# Altium PCB PCB2.PcbDoc
Units mil, origin at the board's own origin, x right, y up, seen from the top; angles counter-clockwise.
Board outline 4460 x 3910 mil, 2 copper layers (Top Layer, Bottom Layer); 37 components, 34 nets, 145 pads, 5 vias.
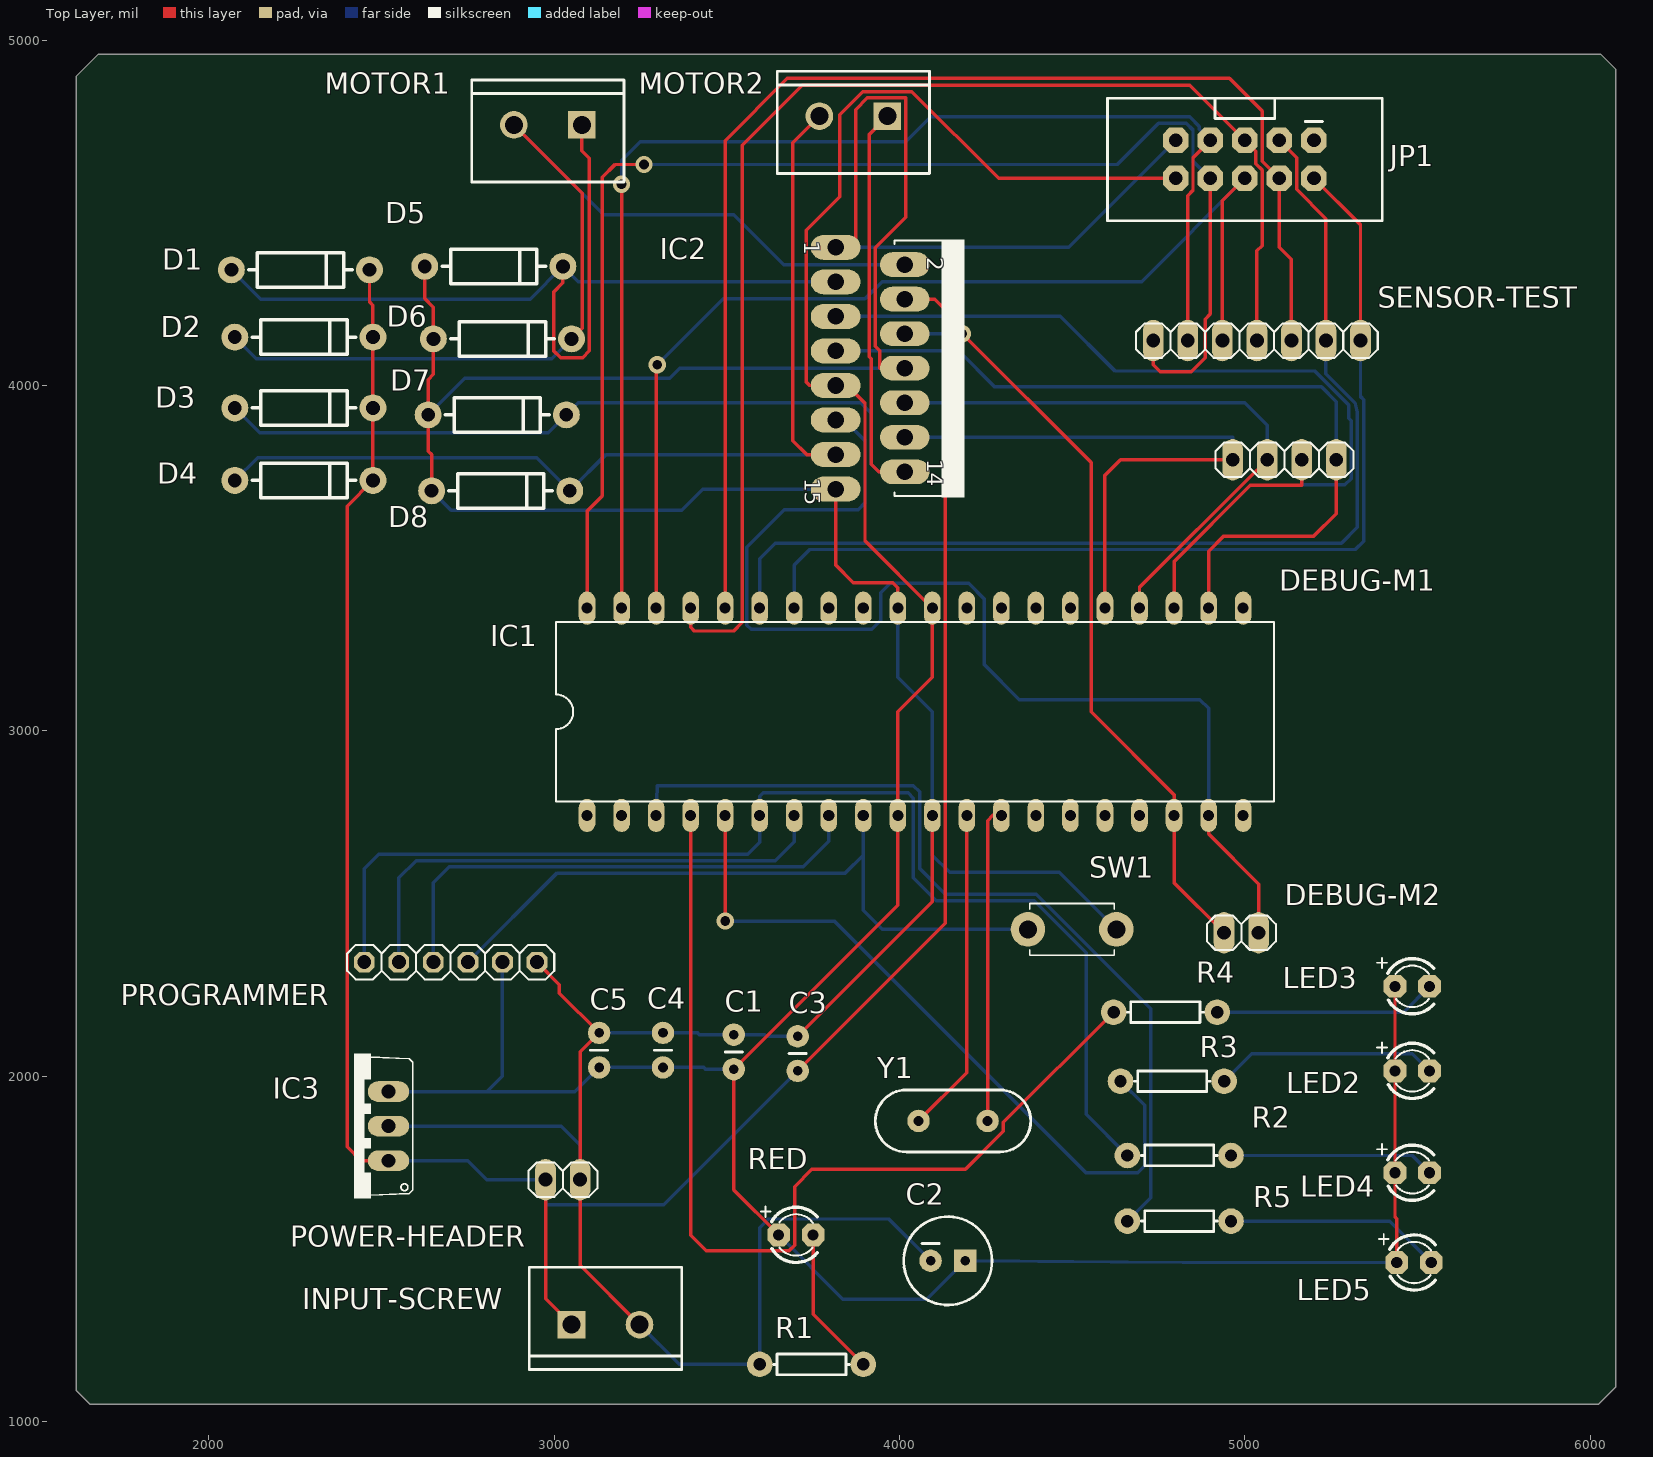
[diagram p0: Top Layer view]
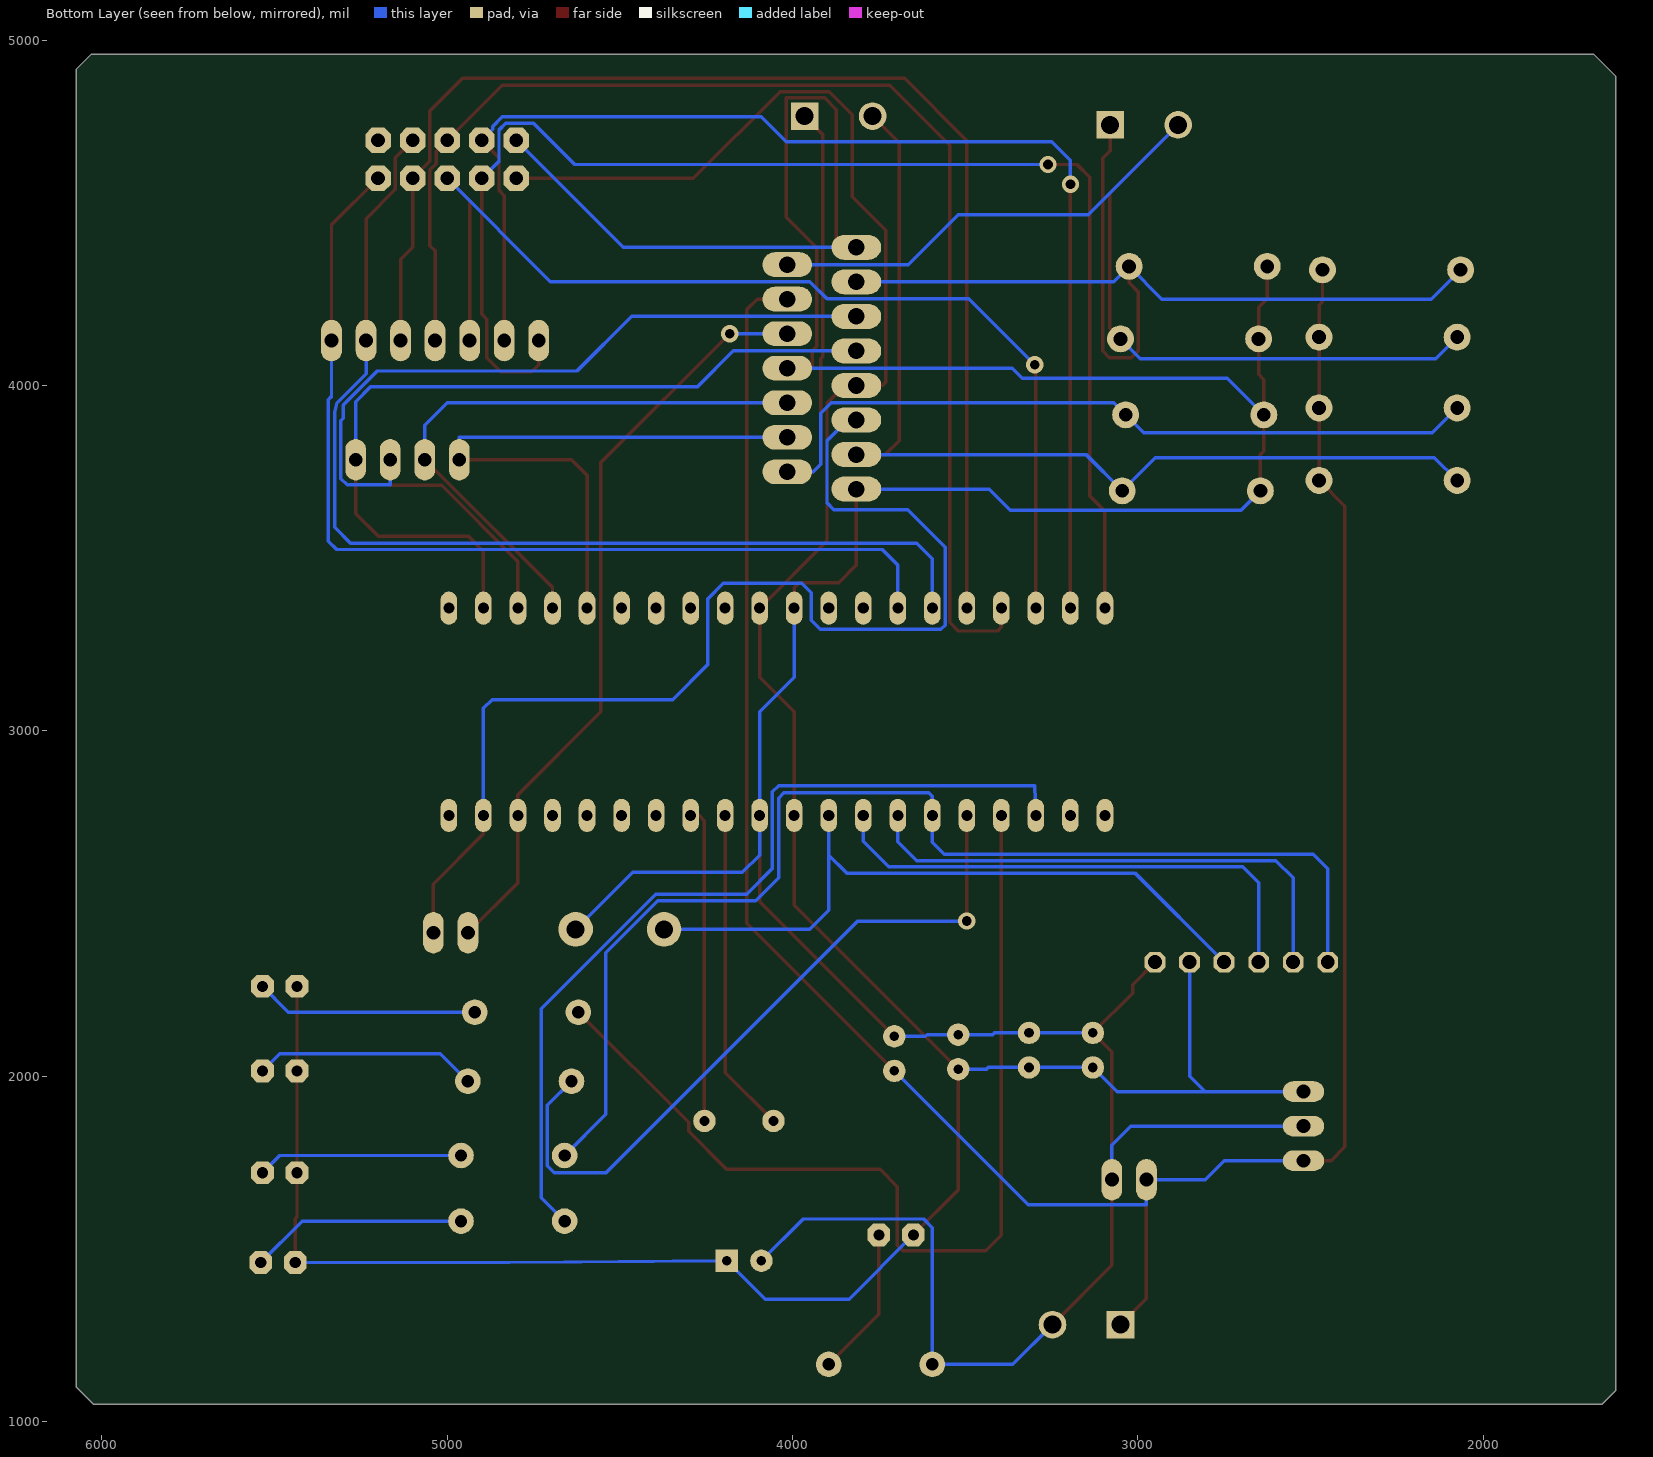
[diagram p1: Bottom Layer view, seen from below]

## Layer stack, top to bottom
Top Solder: solder mask 0.4, Solder Resist, Dk 3.5
Top Layer: signal copper 1.4
Dielectric 1: dielectric 12.6, FR-4, Dk 4.8
Bottom Layer: signal copper 1.4
Bottom Solder: solder mask 0.4, Solder Resist, Dk 3.5

## Board outline
1615,1090 1655,1050 6025,1050 6075,1100 6075,4915 6030,4960 1680,4960 1615,4895

## Design rules (kind name [scope] priority, off if disabled: settings)
Clearance [All] p1: gap=8 ignorepadtopadclearanceinfootprint=FALSE except(0: Arc-Hole Track-Hole SMDPad-SMDPad SMDPad-THPad SMDPad-Via SMDPad-Hole THPad-Hole Via-Hole Fill-Hole Poly-Hole Region-Hole Text-Hole)
Clearance "Clearance (Same Net)" [All] p2: gap=0 ignorepadtopadclearanceinfootprint=FALSE except(8: SMDPad-SMDPad SMDPad-THPad SMDPad-Via)
HoleSize HoleSize_1 [All] p1: absolutevalues=TRUE maxlimit=100000 minlimit=20 maxpercent=80.000 minpercent=20.000
HoleSize [All] p2: absolutevalues=TRUE maxlimit=100 minlimit=1 maxpercent=80.000 minpercent=20.000
HoleToHoleClearance mdViaViaSameLayer [All] p1: gap=8 allowstackedmicrovias=TRUE
HoleToHoleClearance [All] p2: gap=10 allowstackedmicrovias=TRUE
PasteMaskExpansion mlMinCreamFrame [All] p1: expansion=0
PasteMaskExpansion [All] p2: expansion=0
PolygonConnect ThermalVias [IsVia] p1: connectstyle=Direct reliefconductorwidth=10 reliefentries=4 polygonreliefangle="90 Angle" airgapwidth=10
PolygonConnect [All] p2: connectstyle=Relief reliefconductorwidth=10 reliefentries=4 polygonreliefangle="90 Angle" airgapwidth=10
RoutingVias [All] p1: holewidth=28 width=50 viastyle="Through Hole" minholewidth=28 minwidth=50 maxholewidth=28 maxwidth=50
SilkToSilkClearance [All] p1 off: silktosilkclearance=10
SilkToSolderMaskClearance [IsPad] p1 off: minsilkscreentomaskgap=10 clearancetoexposedcopper=TRUE
SolderMaskExpansion mlMinStopFrame [All] p1: expansion=4 istentingtop=FALSE
SolderMaskExpansion [All] p2: expansion=4 istentingtop=FALSE
Width Width_1 [All] p1: maxlimit=100000 minlimit=8 preferedwidth=10
Width [All] p2: maxlimit=10 minlimit=10 preferedwidth=10
25 further rules are at their usual default settings.

## Components (designator, comment, footprint, x,y, rotation, side; value= is the part's Value field where it differs from the comment)
C1 "100n" CAP-PTH-SMALL 3520,2020 r90 top
C2 "100u" CPOL-RADIAL-100UF-25V 4140,1465 r0 top
C3 "100p" CAP-PTH-SMALL 3705,2115 r270 top
C4 "100n" CAP-PTH-SMALL 3315,2025 r90 top
C5 "100n" CAP-PTH-SMALL 3130,2025 r90 top
D1 "DIODEPTH" DIODE-1N4001 2265,4335 r0 top
D2 "DIODEPTH" DIODE-1N4001 2275,4140 r0 top
D3 "DIODEPTH" DIODE-1N4001 2275,3935 r0 top
D4 "DIODEPTH" DIODE-1N4001 2275,3725 r0 top
D5 "DIODEPTH" DIODE-1N4001 2825,4345 r0 top
D6 "DIODEPTH" DIODE-1N4001 2850,4135 r0 top
D7 "DIODEPTH" DIODE-1N4001 2835,3915 r0 top
D8 "DIODEPTH" DIODE-1N4001 2845,3695 r0 top
DEBUG-M1 "PINHD-1X4" 1X04 5115,3785 r0 top
DEBUG-M2 "PINHD-1X2" 1X02 4990,2415 r180 top
IC1 "MEGA16-P" DIL40 4045,3055 r0 top
IC2 "L298" MULTIWATT-15 4115,4050 r270 top
IC3 "78*TV" TO220V 2420,1855 r90 top
INPUT-SCREW "M025MM" SCREWTERMINAL-5MM-2 3050,1280 r0 top
JP1 "M05X2SHD_LOCK" 2X5-SHROUDED_LOCK 5000,4655 r270 top
LED2 "LED3MM" LED3MM 5485,2015 r0 top
LED3 "LED3MM" LED3MM 5485,2260 r0 top
LED4 "LED3MM" LED3MM 5485,1720 r0 top
LED5 "LED3MM" LED3MM 5490,1460 r0 top
MOTOR1 "M025MM" SCREWTERMINAL-5MM-2 3080,4755 r180 top
MOTOR2 "M025MM" SCREWTERMINAL-5MM-2 3965,4780 r180 top
POWER-HEADER "PINHD-1X2" 1X02 3025,1700 r0 top
PROGRAMMER "PINHD-1X6" 1X06 2700,2330 r0 top
R1 "680" AXIAL-0.3 3745,1165 r0 top
R2 "680" AXIAL-0.3 4810,1770 r0 top
R3 "680" AXIAL-0.3 4790,1985 r0 top
R4 "680" AXIAL-0.3 4770,2185 r0 top
R5 "680" AXIAL-0.3 4810,1580 r0 top
RED "LED3MM" LED3MM 3700,1540 r0 top
SENSOR-TEST "PINHD-1X7" 1x07 -44055,-45630 r180 top
SW1 "SWITCH_PUSHBUTTONEVQ-PE" TACT_PANA-EVQ 4500,2425 r180 top
Y1 "CRYSTALHC49US" HC49US 4155,1870 r180 top

## Footprints (in the part's own frame and the unit in brackets; to place one, negate y for a bottom-side part, rotate by r counter-clockwise, add the part's x,y. Pads: shape width x height; smd on the part's side, far side on the other; paste and mask are expansions set on the pad)
1X02 [mil]
  oval 60x120 hole 40: 1(-50,0) 2(50,0)
  silkscreen extent -100,-50 100,50
1X04 [mil]
  oval 60x120 hole 40: 1(-150,0) 2(-50,0) 3(50,0) 4(150,0)
  silkscreen extent -200,-50 200,50
1X06 [mil]
  oct 60x60 hole 40: 1(-250,0) 2(-150,0) 3(-50,0) 4(50,0) 5(150,0) 6(250,0)
  silkscreen extent -300,-50 300,50
1x07 [mil]
  oval 60x120 hole 40: 1(-49390,-49760) 2(-49290,-49760) 3(-49190,-49760) 4(-49090,-49760) 5(-48990,-49760) 6(-48890,-49760) 7(-48790,-49760)
  silkscreen extent -49440,-49810 -48740,-49710
2X5-SHROUDED_LOCK [mil]
  oct 74x74 hole 40: 1(-55,200) 2(55,200) 3(-55,100) 4(55,100) 5(-55,0) 6(55,0) 7(-55,-100) 8(55,-100) 9(-55,-200) 10(55,-200)
  silkscreen extent -177,-398 178,398
AXIAL-0.3 [mil]
  round 74 hole 36: P$1(-150,0) P$2(150,0)
  silkscreen extent -110,-30 110,30
CAP-PTH-SMALL [mil]
  round 65 hole 28: 1(0,0) 2(100,0)
  silkscreen extent 50,-25 50,25
CPOL-RADIAL-100UF-25V [mil]
  rect 65x65 hole 28: 1(50,0)
  round 65 hole 28: 2(-50,0)
  silkscreen extent -128,-128 128,128
DIL40 [mil]
  oval 48x96 hole 32: 1(-950,-300) 2(-850,-300) 3(-750,-300) 4(-650,-300) 5(-550,-300) 6(-450,-300) 7(-350,-300) 8(-250,-300) 9(-150,-300) 10(-50,-300) 11(50,-300) 12(150,-300) 13(250,-300) 14(350,-300) 15(450,-300) 16(550,-300) 17(650,-300) 18(750,-300) 19(850,-300) 20(950,-300) 21(950,300) 22(850,300) 23(750,300) 24(650,300) 25(550,300) 26(450,300) 27(350,300) 28(250,300) 29(150,300) 30(50,300) 31(-50,300) 32(-150,300) 33(-250,300) 34(-350,300) 35(-450,300) 36(-550,300) 37(-650,300) 38(-750,300) 39(-850,300) 40(-950,300)
  silkscreen extent -1040,-260 1040,260
DIODE-1N4001 [mil]
  round 78 hole 40: A(-200,0) C(200,0)
  silkscreen extent -150,-50 150,50
HC49US [mil]
  round 65 hole 28: 1(-100,0) 2(100,0)
  silkscreen extent -225,-90 225,90
LED3MM [mil]
  oct 66x66 hole 32: A(-50,0) K(50,0)
  silkscreen extent -102,-80 62,83
MULTIWATT-15 [mil]
  oval 72x144 hole 48: 1(-350,-300) 2(-300,-100) 3(-250,-300) 4(-200,-100) 5(-150,-300) 6(-100,-100) 7(-50,-300) 8(0,-100) 9(50,-300) 10(100,-100) 11(150,-300) 12(200,-100) 13(250,-300) 14(300,-100) 15(350,-300)
  silkscreen extent -373,-130 374,73
SCREWTERMINAL-5MM-2 [mil]
  rect 80x80 hole 52: 1(0,0)
  round 80 hole 52: 2(197,0)
  silkscreen extent -122,-130 319,166
TACT_PANA-EVQ [mil]
  round 100 hole 52: P$1(-127.95,0) P$2(128,0)
  silkscreen extent -122,-75 123,75
TO220V [mil]
  oval 60x120 hole 40: 1(-100,-100) 2(0,-100) 3(100,-100)
  silkscreen extent -210,-170 210,0

## Part data
C1 C3 C4 C5: library part CAPPTH, "CapacitorStandard 0603 ceramic capacitor, and 0.1\" leaded capacitor."
C2: library part CAP_POLPTH1, "Capacitor PolarizedThese are standard SMD and PTH capacitors. Normally 10uF, 47uF, and 100uF in electrolytic and tantalum varieties. Always verify the external diameter of the through hole cap, it varies with capacity, voltage, and manufacturer. The EIA devices should be standard."
D1 D2 D3 D4 D5 D6 D7 D8: "DiodeThese are standard reverse protection diodes and small signal diodes. SMA package can handle up to about 1A. SOD-323 can handle about 200mA. What the SOD-323 package when ordering, there are some mfgs out there that are 5-pin packages."
DEBUG-M1 DEBUG-M2 POWER-HEADER PROGRAMMER SENSOR-TEST: "PIN HEADER"
IC1: "MICROCONTROLLER   16 Kbytes FLASH 1 kbytes SRAM 512 bytes EEPROM USART 8-channel 10 bit ADC   Source: avr.lbr"
IC2: "DUAL FULL-BRIDGE DRIVER"
IC3: "Positive VOLTAGE REGULATOR   Source: http://cache.national.com/ds/LM/LM78L05.pdf http://www.fairchildsemi.com/ds/LM/LM7805.pdf"
INPUT-SCREW MOTOR1 MOTOR2: "Standard 2-pin 0.1\" header. Use with  - straight break away headers ( PRT-00116) - right angle break away headers (PRT-00553) - swiss pins (PRT-00743) - machine pins (PRT-00117) - female headers (PRT-00115)   Molex polarized connector foot print use with: PRT-08233 with associated crimp pins and housings.  2.54_SCREWTERM for use with  PRT-10571.  3.5mm Screw Terminal footprints for  PRT-08084  5mm Screw Terminal footprints for use with PRT-08432"
JP1: "Header 5x2Standard 10-pin dual row 0.1\" header. Commonly used with AVR-ISP. Use with Spark Fun Electronics SKU: PRT-00778"
LED2 LED3 LED4 LED5 RED: "LED   OSRAM: - CHIPLED LG R971, LG N971, LY N971, LG Q971, LY Q971, LO R971, LY R971 LH N974, LH R974 LS Q976, LO Q976, LY Q976 LO Q996 - Hyper CHIPLED LW Q18S LB Q993, LB Q99A, LB R99A - SideLED LS A670, LO A670, LY A670, LG A670, LP A670 LB A673, LV A673, LT A673, LW A673 LH A674 LY A675 LS A676, LA A676, LO A676, LY A676, LW A676 LS A679, LY A679, LG A679 -  Hyper Micro SIDELED® LS Y876, LA Y876, LO Y876, LY Y876 LT Y87S - SmartLED LW L88C, LW L88S LB L89C, LB L89S, LG L890 LS L89K, LO L89K, LY L89K LS L896, LA L896, LO L896, LY L896 - TOPLED LS T670, LO T670, LY T670, LG T670, LP T670 LSG T670, LSP T670, LSY T670, LOP T670, LYG T670 LG T671, LOG T671, LSG T671 LB T673, LV T673, LT T673, LW T673 LH T674 LS T676, LA T676, LO T676, LY T676, LB T676, LH T676, LSB T676, LW T676 LB T67C, LV T67C, LT T67C, LS T67K, LO T67K, LY T67K, LW E67C LS E67B, LA E67B, LO E67B, LY E67B, LB E67C, LV E67C, LT E67C LW T67C LS T679, LY T679, LG T679 LS T770, LO T770, LY T770, LG T770, LP T770 LB T773, LV T773, LT T773, LW T773 LH T774 LS E675, LA E675, LY E675, LS T675 LS T776, LA T776, LO T776, LY T776, LB T776 LHGB T686 LT T68C, LB T68C - Hyper Mini TOPLED® LB M676 - Mini TOPLED Santana® LG M470 LS M47K, LO M47K, LY M47K    Source: http://www.osram.convergy.de/"
R1 R2 R3 R4 R5: library part 1KOHM-1/4W-1%(PTH), "RES-12182"
SW1: "ButtonsSOFTTOUCHSMD_SJ - Soft touch temporary push button (Super Junk Akihabara)    Compatible with SKPMANE010 [Mouser: 688-SKPMAN]   C&K_KSS = Digikey: KSS221GLFS"
Y1: "Various standard crystals. Proven footprints."

## Via types
v1: diameter 50, hole 28, Top Layer to Bottom Layer, 5 vias

## Nets (pads, with @x,y where several pads share a name; then routed paths per layer and width w, separated by ;. In a path a pad name is that pad's centre, name@x,y a point inside that pad or via, vN(x,y) a via of type N, cw(c..) or ccw(c..) an arc to the next point about the centre after c; other vN are vias at no path point)
GND: C1.2 C2.2 C3.1 C4.2 C5.2 D5.A D6.A D7.A D8.A IC1.11 IC1.31 IC2.1 IC2.8 IC2.15 IC3.2 INPUT-SCREW.2 JP1.9 POWER-HEADER.2 PROGRAMMER.6 R1.P$1 SW1.P$1 | length 12440.4
  Top Layer w10: D5.A 2625,4252 2650,4227 D6.A 2650,4032 2635,4017 D7.A 2635,3810 2645,3800 D8.A ; PROGRAMMER.6 3015,2265 3015,2240 C5.2 3075,2070 POWER-HEADER.2 3075,1452 INPUT-SCREW.2 ; C3.1 4095,2505 IC1.11 ; IC2.15 3815,3480 3866,3429 3980,3429 3995,3414 IC1.31 ; IC2.1 3873,4400 3873,4799.1 3906.9,4833 4018,4833 4018,4487 3930,4399 3930,4114 3943,4101 3943,4050 IC2.8
  Bottom Layer w10: IC3.2 3020,1855 3075,1800 POWER-HEADER.2 ; D7.A 2741.23,4021.23 3335,4021.23 3363.77,4050 IC2.8 ; D8.A 2701,3639 3369,3639 3430,3700 IC2.15 ; C5.2 C4.2 3415,2125 3420,2120 C1.2 3610,2120 3615,2115 C3.1 ; INPUT-SCREW.2 3362,1165 R1.P$1 3595,1561 3620,1586 3969,1586 C2.2 ; IC2.1 4490,4400 JP1.9 ; IC1.31 3995,3155 4095,3055 IC1.11 4095,2640 4145,2590 4462.95,2590 SW1.P$1
IDC2: IC1.34 JP1.2 SENSOR-TEST.1 | length 2913.2
  Top Layer w10: JP1.2 5335,4465 SENSOR-TEST.1
  Bottom Layer w10: IC1.34 3695,3480 3740,3525 5320,3525 5344,3549 5344,3959 5335,3968 SENSOR-TEST.1
IDC3: IC1.35 JP1.3 SENSOR-TEST.2 | length 3124.3
  Top Layer w10: JP1.3 5150,4660 5150,4568 5235,4483 SENSOR-TEST.2
  Bottom Layer w10: IC1.35 3595,3498 3640,3543 5280,3543 5326,3589 5326,3923 5319,3950.46 5235,4034.46 SENSOR-TEST.2
IDC4: IC1.36 JP1.4 SENSOR-TEST.3 | length 3723
  Top Layer w10: IC1.36 3495,4709 3675.36,4889.36 4955.64,4889.36 5050,4795 5050,4650 JP1.4 5100,4400 5135,4365 SENSOR-TEST.3
IDC5: IC1.37 JP1.5 SENSOR-TEST.4 | length 3801.4
  Top Layer w10: IC1.37 3395,3300 3406,3289 3520,3289 3545,3314 3545,4696 3718,4869 4841,4869 JP1.5 5032,4678 5032,4642 5050,4624 5050,4405 5035,4390 SENSOR-TEST.4
IDC7: IC1.39 JP1.7 SENSOR-TEST.6 | length 3694
  Top Layer w10: IC1.39 v1(3195,4583) ; SENSOR-TEST.6 4835,4550 4850,4565 4850,4660 JP1.7
  Bottom Layer w10: v1(3195,4583) 3195,4652.02 3248.98,4706 4018,4706 4090,4778 4840,4778 4868,4750 4868,4742 JP1.7
M11: DEBUG-M1.3 IC1.23 IC2.5 | length 2702.3
  Top Layer w10: IC1.23 4795,3490 5016,3711 5165,3711 DEBUG-M1.3
  Bottom Layer w10: IC2.5 4466,4200 4624,4042 5202,4042 5300.6,3943.4 5300.6,3904.78 5308,3897.38 5308,3730 5290,3712 5165,3712 DEBUG-M1.3
M12: DEBUG-M1.4 IC1.22 IC2.7 | length 2415
  Top Layer w10: IC1.22 4895,3520 4939,3564 5200,3564 5265,3629 DEBUG-M1.4
  Bottom Layer w10: IC2.7 4171,4100 4275,3996 5222,3996 5265,3953 DEBUG-M1.4
M21: DEBUG-M1.2 IC1.24 IC2.10 | length 1778.3
  Top Layer w10: IC1.24 4695,3416 5034,3755 5065,3755 DEBUG-M1.2
  Bottom Layer w10: IC2.10 5000,3950 5065,3885 DEBUG-M1.2
M22: DEBUG-M1.1 IC1.25 IC2.12 | length 1788.6
  Top Layer w10: IC1.25 4595,3740 4640,3785 DEBUG-M1.1
  Bottom Layer w10: IC2.12 4965,3850 DEBUG-M1.1
ME11: DEBUG-M2.2 IC1.18 IC2.6 | length 2216
  Top Layer w10: v1(4182,4150) 4555,3777 4555,3055 4795,2815 IC1.18 4795,2560 DEBUG-M2.2
  Bottom Layer w10: IC2.6 v1(4182,4150)
ME12: DEBUG-M2.1 IC1.19 IC2.11 | length 3326.1
  Top Layer w10: IC1.19 4895,2701 5040,2556 DEBUG-M2.1
  Bottom Layer w10: IC2.11 3840,3900 3900,3840 3900,3660 3880,3640 3666,3640 3558,3532 3558,3306 3570,3294 3920,3294 3946,3320 3946,3400 3973,3427 4200,3427 4246,3381 4246,3191 4347,3090 4870,3090 4895,3065 IC1.19
MISO: IC1.7 PROGRAMMER.2 | length 1508.5
  Bottom Layer w10: PROGRAMMER.2 2550,2574 2600,2624 3640,2624 3695,2679 IC1.7
MOSI: IC1.6 PROGRAMMER.1 R2.P$1 | length 3493.4
  Bottom Layer w10: PROGRAMMER.1 2450,2600 2492,2642 3560,2642 3595,2677 IC1.6 3595,2810 3605,2820 4025,2820 4040,2805 4040,2574 4106,2508 4390,2508 4541,2357 4541,1889 R2.P$1
NetD1_A: D1.A D5.C IC2.3 MOTOR1.1 | length 2883.5
  Top Layer w10: D5.C 3025,4297 2998,4270 2998,4101 3019,4080 3082,4080 3102,4100 3102,4658 3080,4680 MOTOR1.1
  Bottom Layer w10: D1.A 2150,4250 2930,4250 D5.C 3070,4300 IC2.3
NetD2_A: D2.A D6.C IC2.2 MOTOR1.2 | length 3038.9
  Top Layer w10: MOTOR1.2 3081,4557 3081,4166 D6.C
  Bottom Layer w10: D2.A 2137,4078 2993,4078 D6.C ; MOTOR1.2 3143,4495 3520,4495 3665,4350 IC2.2
NetD3_A: D3.A D7.C IC2.14 MOTOR2.1 | length 3314
  Top Layer w10: MOTOR2.1 3912,4727 3912,4083 3918,4077 3918,3772 3940,3750 IC2.14
  Bottom Layer w10: D3.A 2147,3863 2983,3863 D7.C 3070,3950 3888,3950 3918,3920 3918,3772 3940,3750 IC2.14
NetD4_A: D4.A D8.C IC2.13 MOTOR2.2 | length 2963.1
  Top Layer w10: MOTOR2.2 3691,4703 3691,3840 3731,3800 IC2.13
  Bottom Layer w10: D4.A 2141,3791 2949,3791 D8.C 3150,3800 IC2.13
NetIC1_3: IC1.3 R5.P$1 | length 2556.2
  Bottom Layer w10: IC1.3 3299,2841 4040,2841 4058,2823 4058,2601 4132,2527 4396.46,2527 4728,2195.46 4728,1648 R5.P$1
NetIC1_4: IC1.4 R4.P$1 | length 2860.7
  Top Layer w10: IC1.4 3395,1539 3440,1494 3680,1494 3696,1510 3696,1680 3746,1730 4191,1730 4301,1840 4301,1866 R4.P$1
NetIC1_5: IC1.5 R3.P$1 | length 2105.2
  Top Layer w10: v1(3495,2449) IC1.5
  Bottom Layer w10: v1(3495,2449) 3811,2449 4540,1720 4690,1720 4710,1740 4710,1915 R3.P$1
NetIC1_12: IC1.12 Y1.2 | length 943
  Top Layer w10: Y1.2 4195,2010 IC1.12
NetIC1_13: IC1.13 Y1.1 | length 916.2
  Top Layer w10: Y1.1 4255,2740 4270,2755 IC1.13
NetIC1_38: IC1.38 JP1.6 SENSOR-TEST.5 | length 3128.8
  Top Layer w10: IC1.38 3295,4057 v1(3298,4060) ; SENSOR-TEST.5 4935,4535 JP1.6
  Bottom Layer w10: v1(3298,4060) 3489,4251 3900,4251 3950,4301 4701,4301 JP1.6
NetIC1_40: IC1.40 JP1.8 SENSOR-TEST.7 | length 3982.3
  Top Layer w10: IC1.40 3095,3636 3139,3680 3139,4603 3176,4640 v1(3260,4640) ; SENSOR-TEST.7 4735,4060 4755,4040 4845,4040 4885,4080 4885,4192 4900,4207 JP1.8
  Bottom Layer w10: v1(3260,4640) 4630,4640 4750,4760 4830,4760 4850,4740 4850,4650 JP1.8
NetLED2_K: LED2.K R3.P$2 | length 648.8
  Bottom Layer w10: R3.P$2 5020,2065 5485,2065 LED2.K
NetLED3_K: LED3.K R4.P$2 | length 646.1
  Bottom Layer w10: R4.P$2 5460,2185 LED3.K
NetLED4_K: LED4.K R2.P$2 | length 595.7
  Bottom Layer w10: R2.P$2 5485,1770 LED4.K
NetLED5_K: LED5.K R5.P$2 | length 629.7
  Bottom Layer w10: R5.P$2 5420,1580 LED5.K
NetR1_P$2: R1.P$2 RED.K | length 435.1
  Top Layer w10: RED.K 3750,1310 R1.P$2
RST: IC1.9 PROGRAMMER.4 SW1.P$2 | length 2048.2
  Bottom Layer w10: PROGRAMMER.4 3008,2588 3843,2588 3895,2640 ; IC1.9 3895,2640 ; SW1.P$2 3950,2425 3895,2480 3895,2640
SCK: IC1.8 PROGRAMMER.3 | length 1499.7
  Bottom Layer w10: PROGRAMMER.3 2650,2560 2696,2606 3721,2606 3795,2680 IC1.8
VCC: C1.1 C2.1 C4.1 C5.1 IC1.10 IC1.30 IC2.9 IC3.3 JP1.10 LED2.A LED3.A LED4.A LED5.A PROGRAMMER.5 RED.A | length 9035.8
  Top Layer w10: RED.A 3520,1670 C1.1 3995,2495 IC1.10 3995,3055 4095,3155 IC1.30 3900,3550 3900,3949 3849,4000 IC2.9 3740,4000 3730,4010 3730,4449 3827,4546 3827,4784 3894,4851 4036,4851 4287,4600 JP1.10 ; LED3.A LED2.A LED4.A 5435,1592 5440,1587 LED5.A
  Bottom Layer w10: IC3.3 2805,1955 ; PROGRAMMER.5 2850,2000 2805,1955 ; C1.1 3438,2020 3433,2025 C4.1 C5.1 3060,1955 2805,1955 ; RED.A 3836,1354 4079,1354 C2.1 4820,1460 LED5.A
VSOURCE: C3.2 D1.C D2.C D3.C D4.C IC2.4 IC3.1 INPUT-SCREW.1 POWER-HEADER.1 | length 7115.6
  Top Layer w10: D1.C 2465,4242 2475,4232 D2.C D3.C D4.C 2400,3650 2400,1795 2440,1755 IC3.1 ; POWER-HEADER.1 2975,1355 INPUT-SCREW.1 ; C3.2 4132,2442 4132,4220 4102,4250 IC2.4
  Bottom Layer w10: IC3.1 2749,1755 2804,1700 POWER-HEADER.1 2975,1627 3317,1627 C3.2
pads on no net: IC1.1 IC1.2 IC1.14 IC1.15 IC1.16 IC1.17 IC1.20 IC1.21 IC1.26 IC1.27 IC1.28 IC1.29 IC1.32 IC1.33 JP1.1

## Silkscreen, mask and mechanical layers (free items; w line width, h text height)
Mechanical 1:
  the board outline again, w10

## Text inside footprints (layer, text, board x,y; h text height)
IC2: Top Overlay "1" at 3707.98,4417.22 h77.5 r270; Top Overlay "15" at 3710.31,3732 h77.5 r270; Top Overlay "2" at 4065,4371.91 h77.5 r270; Top Overlay "14" at 4065,3787 h77.5 r270
IC3: Mechanical 16 "1" at 2545,1730 h77.5 r90; Mechanical 16 "2" at 2545,1830 h77.5 r90; Mechanical 16 "3" at 2545,1930 h77.5 r90